# Altium PCB ESP32 with USBC PCB V1.PcbDoc (part 1 of 3)
Units mil, origin at the board's own origin, x right, y up, seen from the top; angles counter-clockwise.
Board outline 2800 x 1000 mil, 4 copper layers (L1, L2, L3, L4), stack 61.583 mil thick; 64 components, 73 nets, 299 pads, 158 vias.
Unrouted connection lines stored in the file: 2.
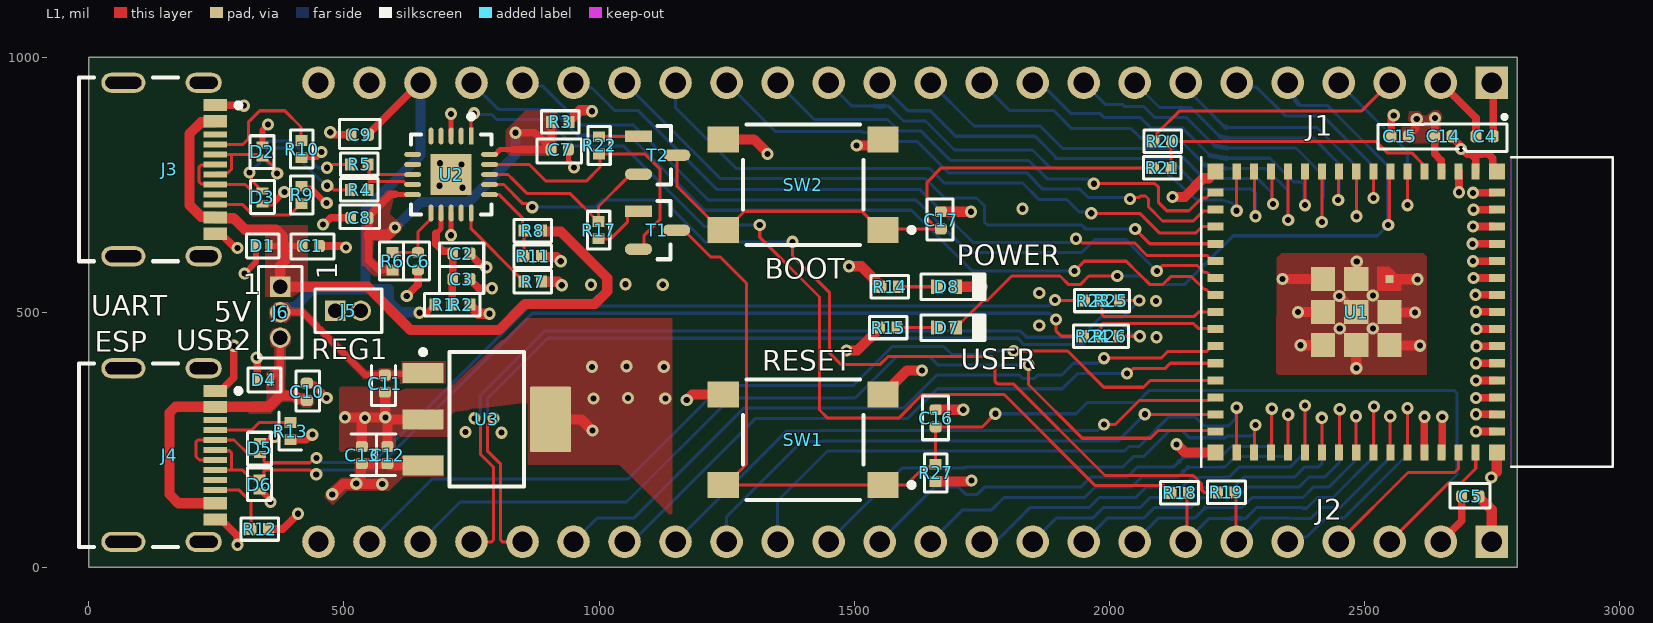
[diagram p0: L1 view]
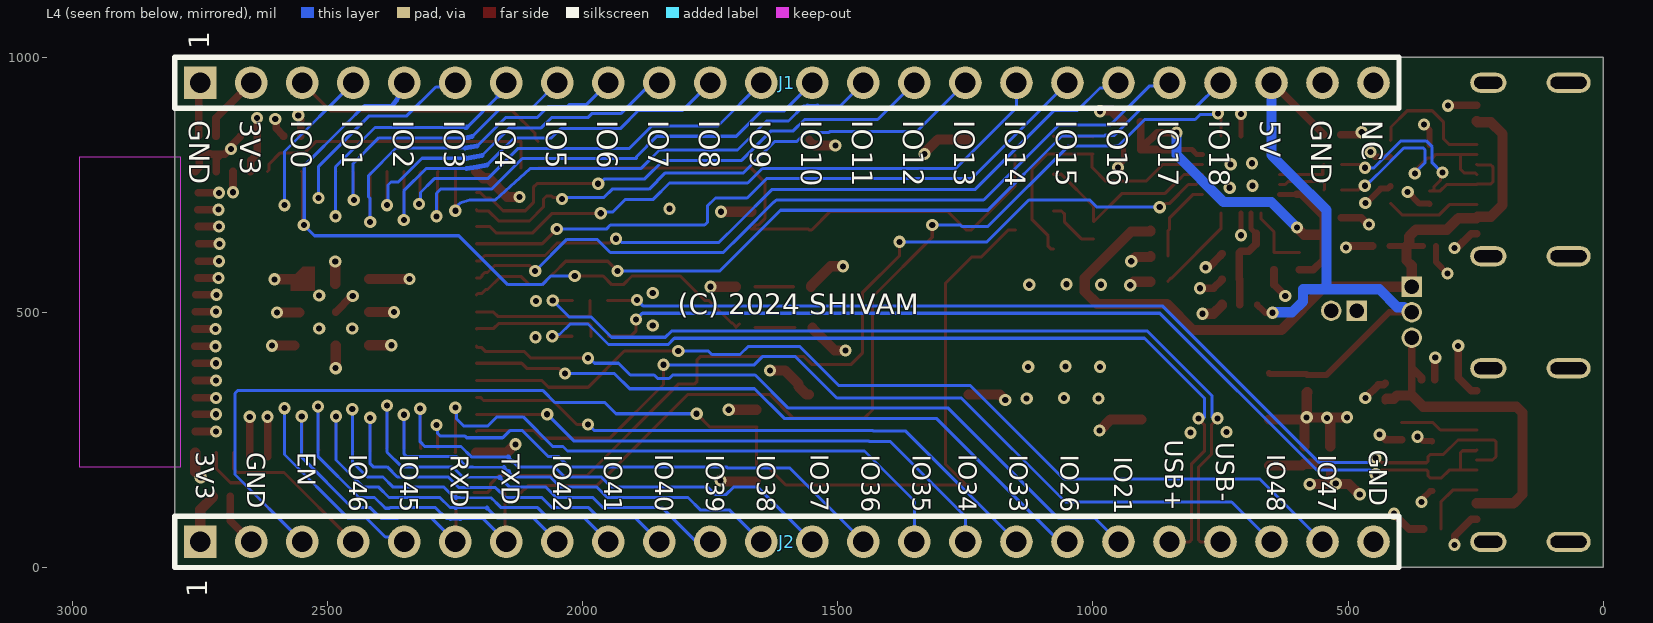
[diagram p1: L4 view, seen from below]
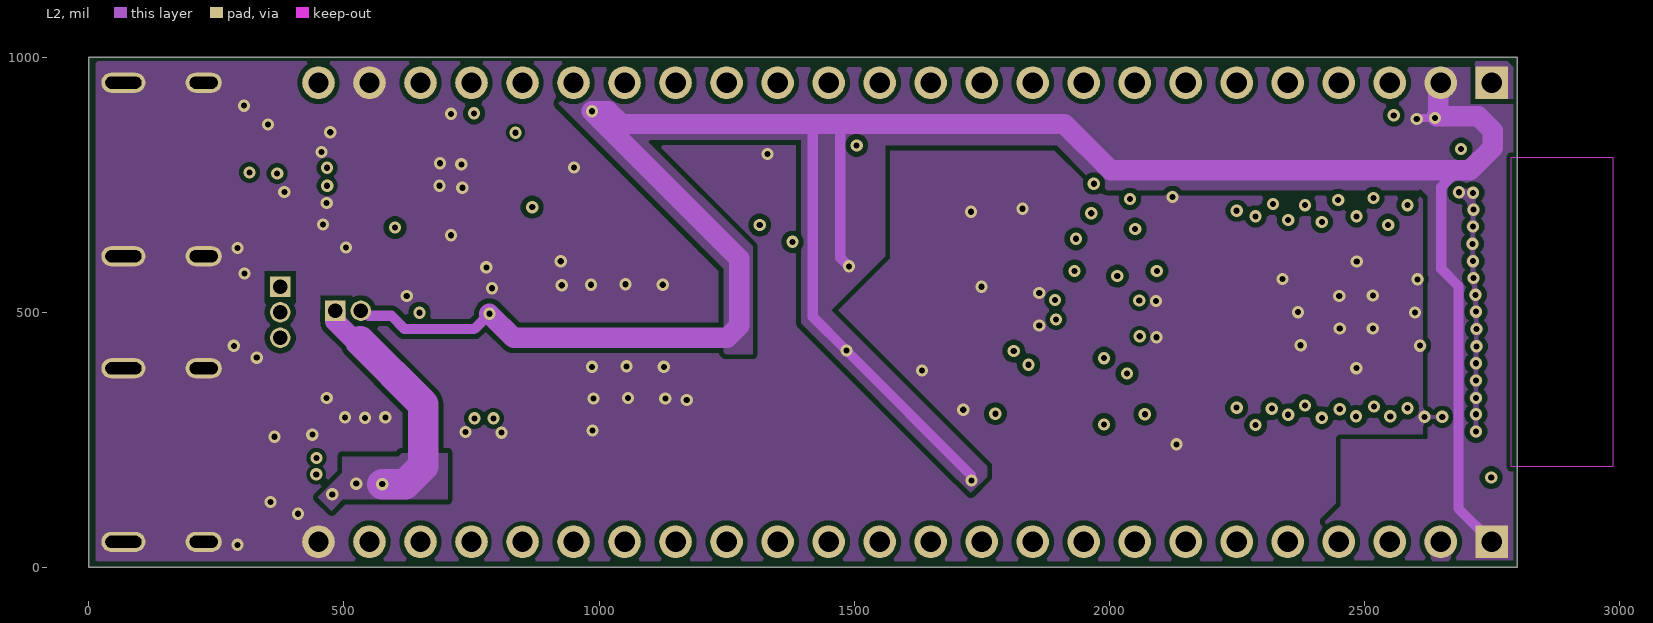
[diagram p2: L2]
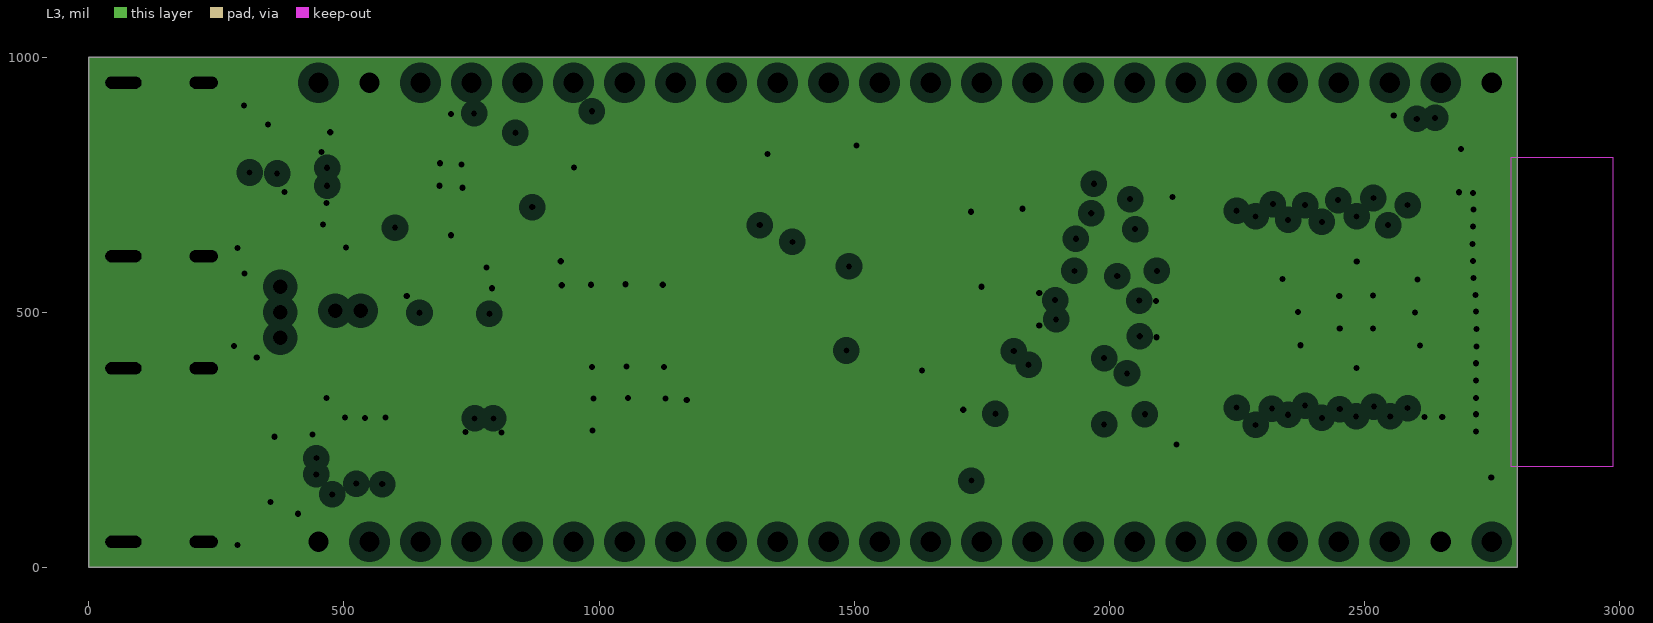
[diagram p3: L3, clearances drawn from the general rule]
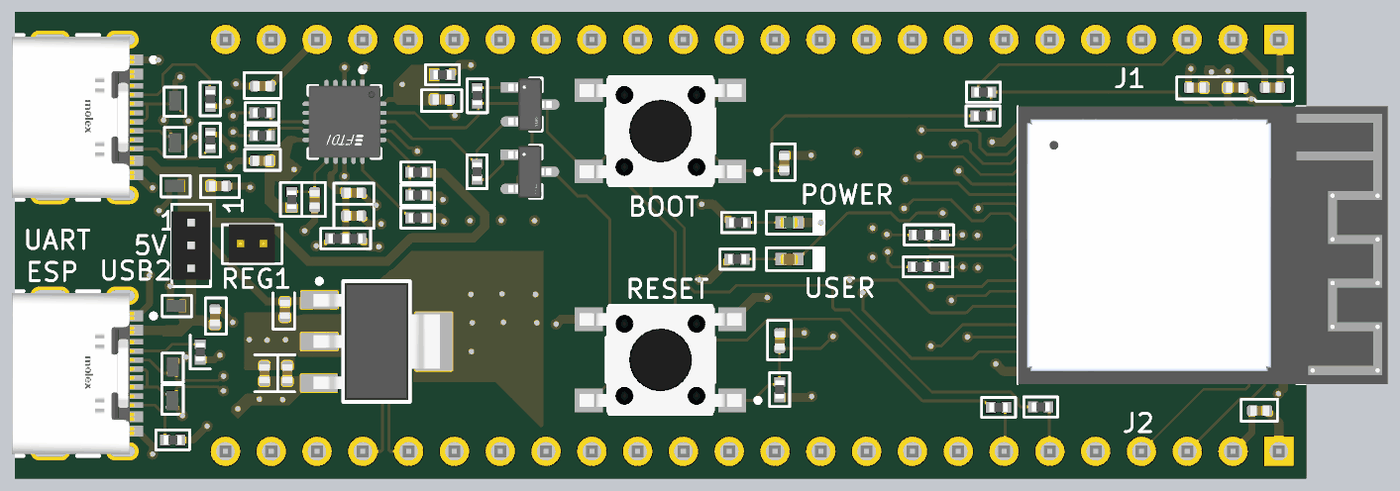
[diagram p5: 3D render of the assembled board from above, using the file's embedded part models]

## Layer stack, top to bottom
Top Solder: solder mask 0.4, Solder Resist, Dk 3.5
L1: signal copper 1.378
Dielectric 2: prepreg 3.9134, PP-006, Dk 4.1
L2: signal copper 0.5984
Dielectric 1: dielectric 49.8031, FR-4, Dk 4.8
L3: plane copper 0.5984, net GND
Dielectric 3: prepreg 3.9134, PP-006, Dk 4.1
L4: signal copper 1.378
Bottom Solder: solder mask 0.4, Solder Resist, Dk 3.5

## Board outline
0,0 2800,0 2800,1000 0,1000

## Design rules (kind name [scope] priority, off if disabled: settings)
Clearance SMALLER_1 [(WithinRoom('CONNECTOR_2')) And (Layer = 'L1')] p1: gap=6 ignorepadtopadclearanceinfootprint=FALSE
Clearance SMALLER_2 [WithinRoom('CONNECTOR_1')] p2: gap=6 ignorepadtopadclearanceinfootprint=FALSE
Clearance SMALLER [WithinRoom('FTDI')] p3: gap=6 ignorepadtopadclearanceinfootprint=FALSE
Clearance "DIFF90 CLEARANCE" [InDifferentialPairClass('DIFF90')] p4: gap=8 ignorepadtopadclearanceinfootprint=FALSE
Clearance [All] p5: gap=10 ignorepadtopadclearanceinfootprint=FALSE except(6: SMDPad-SMDPad)
ComponentClearance R24R26 [InComponent('R24') vs InComponent('R26')] p1: gap=0 collisioncheckmode=3 verticalgap=0 showdistances=FALSE
ComponentClearance R1R2 [InComponent('R1') vs InComponent('R2')] p2: gap=0 collisioncheckmode=3 verticalgap=0 showdistances=FALSE
ComponentClearance R23R25 [InComponent('R23') vs InComponent('R25')] p3: gap=0 collisioncheckmode=3 verticalgap=0 showdistances=FALSE
ComponentClearance [All] p4: gap=10 collisioncheckmode=3 verticalgap=10 showdistances=FALSE
DiffPairsRouting DIFF90 [InDifferentialPairClass('DIFF90')] p1: maxlimit=10 minlimit=8 mostfreqgap=8 toplayer_minwidth=6.03 toplayer_maxwidth=6.23 toplayer_prefwidth=6.03 midlayer1_maxgap=8.1 midlayer1_minwidth=5.1 midlayer1_maxwidth=5.2 midlayer1_prefwidth=5.1 bottomlayer_maxgap=8.1 bottomlayer_minwidth=6.03 bottomlayer_maxwidth=6.03 bottomlayer_prefwidth=6.03 maxuncoupledlength=500
MinimumSolderMaskSliver [All] p1: minsoldermaskwidth=3.15
PlaneClearance [All] p1: clearance=20
PlaneConnect [All] p1: pad.planeconnectstyle=Relief pad.reliefexpansion=15 pad.reliefentries=4 pad.reliefconductorwidth=20 pad.reliefairgap=10 via.planeconnectstyle=Direct via.reliefexpansion=20 via.reliefentries=4 via.reliefconductorwidth=10 via.reliefairgap=10
PolygonConnect [All] p1: connectstyle=Direct reliefconductorwidth=10 reliefentries=4 polygonreliefangle="90 Angle" airgapwidth=10
RoomDefinition FTDI [False vs False] p1: confinementstyle=ConfineIn formatcopy=TRUE lockcomponents=FALSE outline 610,888 837,888 837,637 610,637
RoomDefinition CONNECTOR_2 [False vs False] p2: confinementstyle=ConfineIn formatcopy=TRUE lockcomponents=FALSE outline 136,376 323,376 323,61 136,61
RoomDefinition CONNECTOR_1 [False vs False] p3: confinementstyle=ConfineIn formatcopy=TRUE lockcomponents=FALSE outline -17,1003 307,1003 307,543 -17,543
RoutingVias [All] p1: holewidth=12 width=24 viastyle="Through Hole" minholewidth=12 minwidth=24 maxholewidth=12 maxwidth=24
SilkToSilkClearance [All] p1: silktosilkclearance=6
SilkToSolderMaskClearance [IsPad] p1: minsilkscreentomaskgap=6 clearancetoexposedcopper=TRUE
SolderMaskExpansion [All] p1: expansion=2 istentingtop=FALSE
SupplyNets "Schematic Supply Nets_5" [InNet('+5V_VBUS2')] p1: voltage=0.000
SupplyNets "Schematic Supply Nets_4" [InNet('+5V')] p2: voltage=0.000
SupplyNets "Schematic Supply Nets_3" [InNet('GND')] p3: voltage=0.000
SupplyNets "Schematic Supply Nets_2" [InNet('+5V_VBUS1')] p4: voltage=0.000
SupplyNets "Schematic Supply Nets_1" [InNet('+3V3')] p5: voltage=0.000
SupplyNets "Schematic Supply Nets" [InNet('3.3V_REG')] p6: voltage=0.000
Width [All] p1: maxlimit=100 minlimit=6 preferedwidth=10 minimp=50.000000 maximp=50.000000 favimp=50.000000
23 further rules are at their usual default settings.

## Classes and differential pairs
differential pair class DIFF90: CON1_USB CON2_USB CON_ESP_USB ESP_USB FTDI_USB
differential pair FTDI_USB: +FTDI_USB_P -FTDI_USB_N
differential pair ESP_USB: +ESP_USB_P -ESP_USB_N
differential pair CON_ESP_USB: +CON_ESP_USB_P -CON_ESP_USB_N
differential pair CON2_USB: +CON2_USB_P -CON2_USB_N
differential pair CON1_USB: +CON1_USB_P -CON1_USB_N

## Components (designator, comment, footprint, x,y, rotation, side; value= is the part's Value field where it differs from the comment)
C1 "100nF, 50V" CAPC1005X55N 435,630 r180 top
C2 "4u7, 16V" CAPC1005X55N 730,615 r180 top value=4.7uF
C3 "100nF, 50V" CAPC1005X55N 730,565 r180 top
C4 "100nF, 50V" CAPC1005X55N 2736,845 r180 top
C5 "100nF, 50V" CAPC1005X55N 2708,139 r0 top
C6 "100nF, 50V" CAPC1005X55N 645,600 r90 top
C7 "100nF, 50V" CAPC1005X55N 923,819 r180 top
C8 "100nF, 50V" CAPC1005X55N 530,685 r0 top
C9 "100nF, 50V" CAPC1005X55N 531,848 r0 top
C10 "100nF, 50V" CAPC1005X55N 427,344.07 r270 top
C11 "4u7, 16V" CAPC1005X55N 580,360 r90 top value=4.7uF
C12 "10uF, 10V" CAPC1005X55N 585,220 r270 top value=10uF
C13 "10uF, 10V" CAPC1005X55N 535,220 r270 top value=10uF
C14 "10uF, 10V" CAPC1005X55N 2655,845 r180 top value=10uF
C15 "100nF, 50V" CAPC1005X55N 2570,845 r0 top
C16 "1uF, 35V" CAPC1005X55N 1660,292 r90 top value=1uF
C17 "100nF, 50V" CAPC1005X55N 1670,680 r270 top
D1 "AQ3045-01ETG" SOD882 340,630 r180 top
D2 "AQ3045-01ETG" SOD882 340,815 r90 top
D3 "AQ3045-01ETG" SOD882 340,725 r270 top
D4 "AQ3045-01ETG" SOD882 343,368 r180 top
D5 "AQ3045-01ETG" SOD882 335,233.8 r90 top
D6 "AQ3045-01ETG" SOD882 334,162.2 r270 top
D7 "RED LED" LED0402R 1681.3,470 r180 top
D8 "GREEN" LED0402G 1681.3,550 r180 top
J1 "0022284245" HDR_1X24_2.54MM 2750,950 r90 bottom locked
J2 "0022284245" HDR_1X24_2.54MM 2750,50 r90 bottom locked
J3 "217179-0001" FP-2171790001-MFG 112.8,779.92 r270 top locked
J4 "217179-0001" FP-2171790001-MFG 112.8,220.08 r270 top locked
J5 "FTS-102-01-F-S" HDR_1X2_1.27MM 483,503 r90 top
J6 "FTS-103-01-F-S" HDR_1X3_1.27MM 375,550 r0 top locked
R1 "0R" RESC1005X37N 695,515 r0 top
R2 "0R" RESC1005X37N 730,515 r180 top
R3 "0R" RESC1005X37N 924.01,873 r180 top
R4 "27R" RESC1005X37N 530,740 r0 top
R5 "27R" RESC1005X37N 530,790 r0 top
R6 "0R" RESC1005X37N 595,600 r90 top
R7 "10K" RESC1005X37N 870,560 r180 top value=10kR
R8 "4k7" RESC1005X37N 870,660 r0 top value=4.7kR
R9 "5K1" RESC1005X37N 417,730 r270 top value=5.1kR
R10 "5K1" RESC1005X37N 417,820.01 r90 top value=5.1kR
R11 "10K" RESC1005X37N 870,610 r180 top value=10kR
R12 "5K1" RESC1005X37N 335,75 r180 top value=5.1kR
R13 "5K1" RESC1005X37N 395,266.99 r90 top value=5.1kR
R14 "1K" RESC1005X37N 1570,550 r180 top value=1kR
R15 "1K" RESC1005X37N 1567.01,470 r180 top value=1kR
R17 "10K" RESC1005X37N 999,661.01 r90 top value=10kR
R18 "0R" RESC1005X37N 2138,146 r180 top
R19 "0R" RESC1005X37N 2230,147 r180 top
R20 "27R" RESC1005X37N 2105,835 r0 top
R21 "27R" RESC1005X37N 2104,783 r0 top
R22 "10K" RESC1005X37N 1000,827.01 r90 top value=10kR
R23 "0R" RESC1005X37N 1968.99,523 r0 top
R24 "0R" RESC1005X37N 1966.99,453 r0 top
R25 "0R" RESC1005X37N 2003.01,523 r180 top
R26 "0R" RESC1005X37N 2001.01,453 r180 top
R27 "10K" RESC1005X37N 1660,185 r270 top value=10kR
SW1 "PTS645SM43SMTR92LFS" FP-PTS645SM43SMTR92LFS-MFG 1400,250 r180 top locked
SW2 "PTS645SM43SMTR92LFS" FP-PTS645SM43SMTR92LFS-MFG 1400,750 r180 top locked
T1 "SS8050-G" FP-SS8050-G-IPC_B 1114.58,661 r0 top
T2 "SS8050-G" FP-SS8050-G-IPC_B 1115,808 r0 top
U1 "ESP32-S3-MINI-1-N8" XCVR_ESP32-S3-MINI-1-N8 2484.41,500.39 r270 top locked
U2 "FT231XQ-R" FP-QFN-20-IPC_B 710,770 r270 top locked
U3 "TL1963A-33DCYR" DCY0004A_M 780,290 r0 top locked

## Footprints (in the part's own frame and the unit in brackets; to place one, negate y for a bottom-side part, rotate by r counter-clockwise, add the part's x,y. Pads: shape width x height; smd on the part's side, far side on the other; paste and mask are expansions set on the pad)
CAPC1005X55N [mm]
  rrect53% 0.54x0.6 smd: 1(-0.43,0) 2(0.43,0)
  silkscreen extent -1.14,-0.58 0.99,0.66, body extent -0.52,-0.28 0.52,0.28, height 0.56
DCY0004A_M [mm] "SOT223, 4-Leads, Body 6.7x3.7mm, Pitch 2.3mm, IPC Low Density"
  rrect10% 2.05x1 smd: 1(-3.175,2.3) 2(-3.175,0) 3(-3.175,-2.3)
  rrect5% 2.05x3.25 smd: 4(3.175,0)
  silkscreen extent -3.3,-3.35 1.85,3.47, body extent -3.5,-3.25 3.5,3.25, height 1.62
FP-2171790001-MFG [mm]
  rect 0.6x1.15 smd paste+0 mask+0: A1B12(-3.2,3.425) A4B9(-2.4,3.425) B1A12(3.2,3.425) B4A9(2.4,3.425)
  rect 0.3x1.15 smd paste+0 mask+0: A5(-1.25,3.425) A6(-0.25,3.425) A7(0.25,3.425) A8(1.25,3.425) B5(1.75,3.425) B6(0.75,3.425) B7(-0.75,3.425) B8(-1.75,3.425)
  rrect100% 1x1.8 hole 1.4 slot 0.6 at 0 deg paste-2539.97 mask+0: S1(-4.32,2.85) S2(4.32,2.85)
  rrect100% 1x2.2 hole 1.8 slot 0.6 at 0 deg paste-2539.97 mask+0: S3(-4.32,-1.15) S4(4.32,-1.15)
  silkscreen extent -4.57,-3.35 4.57,4.7, body extent -4.92,-3.45 4.92,4.1, height 0.25
FP-PTS645SM43SMTR92LFS-MFG [mm]
  rect 1.55x1.3 smd paste+0 mask+0: 1(-3.975,2.25) 2(3.975,2.25) 3(-3.975,-2.25) 4(3.975,-2.25)
  silkscreen extent -5.53,-3 3,3, body extent -4.5,-3 4.5,3, height 4.3
FP-QFN-20-IPC_B [mm]
  rect 0.84x0.242 smd paste+0 mask+0: 1(-1.916,1)
  rrect100% 0.84x0.242 smd paste+0 mask+0: 2(-1.916,0.5) 3(-1.916,0) 4(-1.916,-0.5) 5(-1.916,-1) 11(1.916,-1) 12(1.916,-0.5) 13(1.916,0) 14(1.916,0.5) 15(1.916,1)
  rrect100% 0.242x0.84 smd paste+0 mask+0: 6(-1,-1.916) 7(-0.5,-1.916) 8(0,-1.916) 9(0.5,-1.916) 10(1,-1.916) 16(1,1.916) 17(0.5,1.916) 18(0,1.916) 19(-0.5,1.916) 20(-1,1.916)
  rect 2.05x2.05 smd paste-1000 mask+0: 21(0,0)
  silkscreen extent -3.01,-2 2,2, body extent -2.59,-2.59 2.59,2.59, height 0.25
FP-SS8050-G-IPC_B [mm]
  rect 1.357x0.572 smd paste+0 mask+0: 1(-0.951,0.95)
  rrect100% 1.357x0.572 smd paste+0 mask+0: 2(-0.951,-0.95) 3(0.951,0)
  silkscreen extent 0,-1.45 0.65,1.45, body extent -1.88,-1.7 1.88,1.7, height 0.25
HDR_1X2_1.27MM [mil]
  rect 40x40 hole 28: 1(0,0)
  round 40 hole 28: 2(0,-50)
  silkscreen extent -42,-91 43,40, body extent -42,-75 44,25, height 154
HDR_1X3_1.27MM [mil]
  rect 40x40 hole 28: 1(0,0)
  round 40 hole 28: 2(0,-50) 3(0,-100)
  silkscreen extent -42,-140 42,40, body extent -42,-125 42,25, height 124
HDR_1X24_2.54MM [mil]
  rect 64x64 hole 40: 1(0,0)
  round 64 hole 40: 2(0,-100) 3(0,-200) 4(0,-300) 5(0,-400) 6(0,-500) 7(0,-600) 8(0,-700) 9(0,-800) 10(0,-900) 11(0,-1000) 12(0,-1100) 13(0,-1200) 14(0,-1300) 15(0,-1400) 16(0,-1500) 17(0,-1600) 18(0,-1700) 19(0,-1800) 20(0,-1900) 21(0,-2000) 22(0,-2100) 23(0,-2200) 24(0,-2300)
  silkscreen extent -50,-2350 50,50, body extent -49,-2350 49,50, height 386
LED0402G [mm]
  rect 0.6x0.7 smd: 1(-0.475,0) 2(0.475,0)
  silkscreen extent -1.91,-0.64 1.27,0.64, body extent -0.48,-0.3 0.52,0.3, height 0.21
LED0402R [mm]
  rect 0.6x0.7 smd: 1(-0.475,0) 2(0.475,0)
  silkscreen extent -1.91,-0.64 1.27,0.64, body extent -0.5,-0.28 0.5,0.32, height 0.21
RESC1005X37N [mm]
  rect 0.54x0.6 smd: 1(-0.432,0) 2(0.432,0)
  silkscreen extent -0.94,-0.56 0.94,0.56, body extent -0.5,-0.25 0.5,0.25, height 0.37
SOD882 [mm]
  rect 0.35x0.6 smd: 1(-0.325,0) 2(0.325,0)
  silkscreen extent -0.84,-0.58 0.79,0.61, body extent -0.51,-0.34 0.56,0.33, height 0.42
XCVR_ESP32-S3-MINI-1-N8 [mm]
  rect 0.8x0.4 smd: 1(-7,5.95) 2(-7,5.1) 3(-7,4.25) 4(-7,3.4) 5(-7,2.55) 6(-7,1.7) 7(-7,0.85) 8(-7,0) 9(-7,-0.85) 10(-7,-1.7) 11(-7,-2.55) 12(-7,-3.4) 13(-7,-4.25) 14(-7,-5.1) 15(-7,-5.95) 31(7,-5.95) 32(7,-5.1) 33(7,-4.25) 34(7,-3.4) 35(7,-2.55) 36(7,-1.7) 37(7,-0.85) 38(7,0) 39(7,0.85) 40(7,1.7) 41(7,2.55) 42(7,3.4) 43(7,4.25) 44(7,5.1) 45(7,5.95)
  rect 0.4x0.8 smd: 16(-5.95,-7) 17(-5.1,-7) 18(-4.25,-7) 19(-3.4,-7) 20(-2.55,-7) 21(-1.7,-7) 22(-0.85,-7) 23(0,-7) 24(0.85,-7) 25(1.7,-7) 26(2.55,-7) 27(3.4,-7) 28(4.25,-7) 29(5.1,-7) 30(5.95,-7) 46(5.95,7) 47(5.1,7) 48(4.25,7) 49(3.4,7) 50(2.55,7) 51(1.7,7) 52(0.85,7) 53(0,7) 54(-0.85,7) 55(-1.7,7) 56(-2.55,7) 57(-3.4,7) 58(-4.25,7) 59(-5.1,7) 60(-5.95,7)
  rect 1.2x1.2 smd: 61(0,0) 67(0,1.65) 68(1.65,1.65) 69(-1.65,0) 70(1.65,0) 71(-1.65,-1.65) 72(0,-1.65) 73(1.65,-1.65)
  rect 0.8x0.8 smd: 62(-7,7) 63(-7,-7) 64(7,-7) 65(7,7)
  rect 0.4x0.4 smd paste-1 mask+0: 66(-1.65,1.65)
  L1 region: -1.05,1.05 -2.25,1.05 -2.25,1.65 -1.65,2.25 -1.05,2.25
  Keep-Out Layer region: 7.7,7.725 -7.7,7.725 -7.7,12.775 7.7,12.775
  Keep-Out Layer region: 7.7,7.725 -7.7,7.725 -7.7,12.775 7.7,12.775
  silkscreen extent -9.82,-7.73 7.7,12.78, body extent -7.7,-7.73 7.7,12.78, height 2.55

## Part data
C1 C3 C4 C5 C6 C7 C8 C9 C10 C15 C17: library part CL05B104KB54PNC, "CAP CER 0.1UF 50V X7R 0402", Capacitor Type=Ceramic, LCSC Part Number=C307331, Manufacturer=Samsung, Supplier Part Number=1276-CL05B104KB54PNCDKR-ND, Category="Ceramic Capacitors", ComponentLink1Description=https://datasheet.ciiva.com:443/pdfs/VipMasterIC/IC/SEMS/SEMS-S-A0006318249/SEMS-S-A0006320959-1.pdf?src-supplier=IHS+Markit, ComponentLink1URL=https://datasheet.ciiva.com:443/pdfs/VipMasterIC/IC/SEMS/SEMS-S-A0006318249/SEMS-S-A0006320959-1.pdf?src-supplier=IHS+Markit, ComponentLink2Description=https://datasheet.octopart.com/CL05B104KB54PNC-Samsung-datasheet-8326407.pdf?src-supplier=TME, ComponentLink2URL=https://datasheet.octopart.com/CL05B104KB54PNC-Samsung-datasheet-8326407.pdf?src-supplier=TME, Dielectric Material=Ceramic, Manufacturer Part Number=CL05B104KB54PNC, Pins=2, Pricing="1=0.1, 10=0.036, 50=0.0246, 100=0.0211, 500=0.01508, 1000=0.0132, 2500=0.01122, 5000=0.01002 (USD)", Reach SVHC Compliant=Yes, RoHS=Yes, RoHS Compliant=Yes, Stock=515143, Supplier=Digikey
C2 C11: library part CL05A475MO5NUNC, "CAP CER 4.7UF 16V X5R 0402", Capacitor Type=Ceramic, Case/Package=0402, LCSC Part Number=C318563, Manufacturer=Samsung, Max Operating Temperature=85°C, Min Operating Temperature=-55°C, Package Shape=Rectangular, Package Style=SMTMeter, Rated DC Voltage (URdc)=16V, Supplier Part Number=1276-6836-1-ND, Temperature Characteristics Code=X5R, Tolerance  (fill in as +-)=20%, Category="Ceramic Capacitors", ComponentLink1Description=https://datasheet.ciiva.com:443/pdfs/VipMasterIC/IC/SEMS/SEMS-S-A0008384515/SEMS-S-A0008898881-1.pdf?src-supplier=IHS+Markit, ComponentLink1URL=https://datasheet.ciiva.com:443/pdfs/VipMasterIC/IC/SEMS/SEMS-S-A0008384515/SEMS-S-A0008898881-1.pdf?src-supplier=IHS+Markit, ComponentLink2Description=http://www.farnell.com/datasheets/2710653.pdf?src-supplier=Farnell, ComponentLink2URL=http://www.farnell.com/datasheets/2710653.pdf?src-supplier=Farnell, ComponentLink3Description=http://www.samsungsem.com/kr/support/product-search/mlcc/CL05A475MO5NUNC.jsp?src-supplier=Digikey, ComponentLink3URL=http://www.samsungsem.com/kr/support/product-search/mlcc/CL05A475MO5NUNC.jsp?src-supplier=Digikey, ComponentLink4Description=http://www.farnell.com/datasheets/2710653.pdf?src-supplier=Newark, ComponentLink4URL=http://www.farnell.com/datasheets/2710653.pdf?src-supplier=Newark, ComponentLink5Description=http://www.farnell.com/datasheets/2710653.pdf?src-supplier=Element14, ComponentLink5URL=http://www.farnell.com/datasheets/2710653.pdf?src-supplier=Element14, ComponentLink6Description=https://datasheet.octopart.com/CL05A475MO5NUNC-Samsung-Electro-Mechanics-datasheet-123102911.pdf?src-supplier=Future+Electronics, ComponentLink6URL=https://datasheet.octopart.com/CL05A475MO5NUNC-Samsung-Electro-Mechanics-datasheet-123102911.pdf?src-supplier=Future+Electronics, Dielectric Material=Ceramic, Height=0.7mm, JESD-609 Code=e3, Length=1mm, Manufacturer Part Number=CL05A475MO5NUNC, Mounting Technology="Surface Mount", Multilayer=Yes, Packaging="Tape and Reel", Pins=2, Pricing="1=0.45, 10=0.268, 50=0.1948, 100=0.1721, 500=0.1333, 1000=0.12121, 2500=0.10837, 5000=0.10058 (USD)", Reach SVHC Compliant=Yes, RoHS=Yes, RoHS Compliant=Yes, Stock=234731, Supplier=Digikey, Terminal Finish=Nickel, Termination=Wraparound, Tolerance (fill in as +-)=20%, Width=0.5mm
C12 C13 C14: library part CL05A106MP8NUB8, "CAP CER 10UF 10V X5R 0402", Capacitor Type=Ceramic, Case/Package=0402, LCSC Part Number=C307415, Manufacturer=Samsung, Max Operating Temperature=85°C, Min Operating Temperature=-55°C, Package Shape=Rectangular, Rated DC Voltage (URdc)=10V, Supplier Part Number=1276-6830-1-ND, Temperature Characteristics Code=X5R, Tolerance  (fill in as +-)=20%, Category="Ceramic Capacitors", ComponentLink1Description=https://datasheet.ciiva.com:443/pdfs/VipMasterIC/IC/SEMS/SEMS-S-A0008521219/SEMS-S-A0008521325-1.pdf?src-supplier=IHS+Markit, ComponentLink1URL=https://datasheet.ciiva.com:443/pdfs/VipMasterIC/IC/SEMS/SEMS-S-A0008521219/SEMS-S-A0008521325-1.pdf?src-supplier=IHS+Markit, ComponentLink2Description=http://www.samsungsem.com/kr/support/product-search/mlcc/CL05A106MP8NUB8.jsp?src-supplier=Digikey, ComponentLink2URL=http://www.samsungsem.com/kr/support/product-search/mlcc/CL05A106MP8NUB8.jsp?src-supplier=Digikey, ComponentLink3Description=https://datasheet.octopart.com/CL05A106MP8NUB8-Samsung-Electro-Mechanics-datasheet-136460857.pdf?src-supplier=Future+Electronics, ComponentLink3URL=https://datasheet.octopart.com/CL05A106MP8NUB8-Samsung-Electro-Mechanics-datasheet-136460857.pdf?src-supplier=Future+Electronics, Dielectric Material=Ceramic, JESD-609 Code=e3, Manufacturer Part Number=CL05A106MP8NUB8, Mounting Technology="Surface Mount", Multilayer=Yes, Packaging="Tape and Reel", Pins=2, Pricing="1=0.33, 10=0.215, 50=0.1584, 100=0.129, 500=0.1018, 1000=0.08597, 2500=0.08145 (USD)", Reach SVHC Compliant=Yes, RoHS=Yes, RoHS Compliant=Yes, Stock=942955, Supplier=Digikey, Terminal Finish=Nickel, Termination=Wraparound, Tolerance (fill in as +-)=20%
C16: library part CL05A105KL5NRNC, "Cap Ceramic 1uF 35V X5R 0.25pF SMD 0402 85°C Cardboard T/R", Case Code (Imperial)=0402, Case Code (Metric)=1005, LCSC Part Number=C307413, Manufacturer=Samsung, Max Operating Temperature=85°C, Min Operating Temperature=-55°C, Supplier Part Number=1276-6796-1-ND, Tolerance=10%, Voltage Rating=35V, Case/Package=0402, Category="Ceramic Capacitors", ComponentLink1Description=http://www.samsungsem.com/kr/support/product-search/mlcc/CL05A105KL5NRNC.jsp?src-supplier=Digikey, ComponentLink1URL=http://www.samsungsem.com/kr/support/product-search/mlcc/CL05A105KL5NRNC.jsp?src-supplier=Digikey, Length=0.039inch, Manufacturer Part Number=CL05A105KL5NRNC, Mounting Technology="Surface Mount", Packaging="Cut Tape", Pricing="1=0.33, 10=0.212, 50=0.149, 100=0.1202, 500=0.08934, 1000=0.07818, 2500=0.07446, 5000=0.06887 (USD)", RoHS=Yes, RoHS Compliant=Yes, Series=CL, Stock=307033, Supplier=Digikey, Thickness=0.022inch, Width=0.02inch
D1 D2 D3 D4 D5 D6: "TVS DIODE 5.3VWM 12VC SOD882", LCSC Part Number=C3710326, Manufacturer=Littelfuse, Max Breakdown Voltage=9V, Max Operating Temperature=150°C, Min Breakdown Voltage=6.8V, Min Operating Temperature=-55°C, Non-rep Peak Rev Power Dis-Max=40W, Package Body Material=Plastic, Package Shape=Rectangular, Package Style="CHIP CARRIERMeter", Rep Pk Reverse Voltage-Max=5.3V, Supplier Part Number=F9321CT-ND, Category="TVS Diodes", ComponentLink1Description=https://datasheet.ciiva.com:443/pdfs/VipMasterIC/IC/LFSI/LFSI-S-A0007892042/LFSI-S-A0007892042-1.pdf?src-supplier=IHS+Markit, ComponentLink1URL=https://datasheet.ciiva.com:443/pdfs/VipMasterIC/IC/LFSI/LFSI-S-A0007892042/LFSI-S-A0007892042-1.pdf?src-supplier=IHS+Markit, ComponentLink2Description=https://www.littelfuse.com/~/media/electronics/datasheets/tvs_diode_arrays/littelfuse_tvs_diode_array_aq3045_datasheet.pdf.pdf?src-supplier=Digikey, ComponentLink2URL=https://www.littelfuse.com/~/media/electronics/datasheets/tvs_diode_arrays/littelfuse_tvs_diode_array_aq3045_datasheet.pdf.pdf?src-supplier=Digikey, ComponentLink3Description=http://www.littelfuse.com/~/media/electronics/datasheets/tvs_diode_arrays/littelfuse_tvs_diode_array_aq3045_datasheet.pdf.pdf?src-supplier=Digikey, ComponentLink3URL=http://www.littelfuse.com/~/media/electronics/datasheets/tvs_diode_arrays/littelfuse_tvs_diode_array_aq3045_datasheet.pdf.pdf?src-supplier=Digikey, Diode Element Material=SILICON, Diode Type="TRANS VOLTAGE SUPPRESSOR", Manufacturer Part Number=AQ3045-01ETG, Number of Elements=1, Pins=2, Polarity=Bidirectional, Pricing="1=0.5, 10=0.391, 100=0.2344, 500=0.217, 1000=0.14756, 2000=0.13585, 5000=0.1302 (USD)", Reach SVHC Compliant=Yes, Reference Standard=AEC-Q101, RoHS=Yes, RoHS Compliant=Yes, Stock=10972, Supplier=Digikey, Surface Mount=Yes, Technology=AVALANCHE, Terminal Form="No Lead", Terminal Position=BOTTOM
D7: library part VLMS1500-GS08, "LED RED 0402 SMD", Color=Red, Forward Current=30mA, Forward Voltage=2.4V, LCSC Part Number=C511370, Manufacturer=Vishay, Max Operating Temperature=85°C, Min Operating Temperature=-30°C, Reverse Voltage-Max=5V, Supplier Part Number=VLMS1500-GS08CT-ND, Category=LEDs, Channels=1, Color@wavelength=Red, ComponentLink1Description=https://datasheet.ciiva.com:443/pdfs/VipMasterIC/IC/VISH/VISH-S-A0003457490/VISH-S-A0003457490-1.pdf?src-supplier=IHS+Markit, ComponentLink1URL=https://datasheet.ciiva.com:443/pdfs/VipMasterIC/IC/VISH/VISH-S-A0003457490/VISH-S-A0003457490-1.pdf?src-supplier=IHS+Markit, ComponentLink2Description=http://www.farnell.com/datasheets/1809983.pdf?src-supplier=Farnell, ComponentLink2URL=http://www.farnell.com/datasheets/1809983.pdf?src-supplier=Farnell, ComponentLink3Description=http://www.mouser.com/ds/2/427/vlmo1500-244705.pdf?src-supplier=Mouser, ComponentLink3URL=http://www.mouser.com/ds/2/427/vlmo1500-244705.pdf?src-supplier=Mouser, ComponentLink4Description=http://www.alliedelec.com/m/d/cfc385e1097fc985ee9a50a3551ac188.pdf?src-supplier=Allied+Electronics, ComponentLink4URL=http://www.alliedelec.com/m/d/cfc385e1097fc985ee9a50a3551ac188.pdf?src-supplier=Allied+Electronics, ComponentLink5Description=https://datasheet.octopart.com/VLMS1500-GS08-Vishay-datasheet-62332426.pdf?src-supplier=Newark, ComponentLink5URL=https://datasheet.octopart.com/VLMS1500-GS08-Vishay-datasheet-62332426.pdf?src-supplier=Newark, ComponentLink6Description=https://datasheet.octopart.com/VLMS1500-GS08-Vishay-datasheet-33014519.pdf?src-supplier=Element14, ComponentLink6URL=https://datasheet.octopart.com/VLMS1500-GS08-Vishay-datasheet-33014519.pdf?src-supplier=Element14, ComponentLink7Description=http://datasheet.octopart.com/VLMS1500-GS08-Vishay-datasheet-21227148.pdf?src-supplier=Avnet, ComponentLink7URL=http://datasheet.octopart.com/VLMS1500-GS08-Vishay-datasheet-21227148.pdf?src-supplier=Avnet, ComponentLink8Description=http://www.farnell.com/datasheets/1809983.pdf?src-supplier=Newark, ComponentLink8URL=http://www.farnell.com/datasheets/1809983.pdf?src-supplier=Newark, ComponentLink9Description=http://www.farnell.com/datasheets/2050839.pdf?src-supplier=Newark, ComponentLink9URL=http://www.farnell.com/datasheets/2050839.pdf?src-supplier=Newark, ComponentLink10Description=https://datasheet.octopart.com/VLMS1500-GS08-Vishay-datasheet-21227148.pdf?src-supplier=Future+Electronics, ComponentLink10URL=https://datasheet.octopart.com/VLMS1500-GS08-Vishay-datasheet-21227148.pdf?src-supplier=Future+Electronics, ComponentLink11Description=http://datasheet.octopart.com/VLMS1500-GS08-Vishay-datasheet-21227148.pdf?src-supplier=Quest, ComponentLink11URL=http://datasheet.octopart.com/VLMS1500-GS08-Vishay-datasheet-21227148.pdf?src-supplier=Quest, ComponentLink12Description=http://datasheet.octopart.com/VLMS1500-GS08-Vishay-datasheet-21227148.pdf?src-supplier=NAC+Semi, ComponentLink12URL=http://datasheet.octopart.com/VLMS1500-GS08-Vishay-datasheet-21227148.pdf?src-supplier=NAC+Semi, ComponentLink13Description=http://datasheet.octopart.com/VLMS1500-GS08-Vishay-datasheet-21227148.pdf?src-supplier=LCSC, ComponentLink13URL=http://datasheet.octopart.com/VLMS1500-GS08-Vishay-datasheet-21227148.pdf?src-supplier=LCSC, Luminous Intensity-Nom=54mcd, Manufacturer Part Number=VLMS1500-GS08, Mounting Technology="Surface Mount", Optoelectronic Device Type="SINGLE COLOR LED", Overall Height=0.35mm, Packaging="Tape and Reel", Pins=2, Pricing="1=0.34, 10=0.265, 100=0.119, 500=0.10746, 1000=0.08827 (USD)", Reach SVHC Compliant=Yes, RoHS=Yes, RoHS Compliant=Yes, Shape=Rectangular, Size=0.5mm, Stock=51454, Supplier=Digikey, Terminal Pitch=0.95mm, Viewing Angle=130°
D8: library part VLMG1500-GS08, "LED YLW-GRN 0402 SMD", Color=Green,Yellow, Color@wavelength=Green, Forward Current=30mA, Forward Voltage=2.4V, LCSC Part Number=C511404, Manufacturer=Vishay, Max Operating Temperature=85°C, Min Operating Temperature=-30°C, Reverse Voltage-Max=5V, Supplier Part Number=VLMG1500-GS08CT-ND, Category=LEDs, Channels=1, ComponentLink1Description=https://datasheet.ciiva.com:443/pdfs/VipMasterIC/IC/VISH/VISH-S-A0003457490/VISH-S-A0003457490-1.pdf?src-supplier=IHS+Markit, ComponentLink1URL=https://datasheet.ciiva.com:443/pdfs/VipMasterIC/IC/VISH/VISH-S-A0003457490/VISH-S-A0003457490-1.pdf?src-supplier=IHS+Markit, ComponentLink2Description=https://datasheet.ciiva.com/12071/vlmo1500-244705-12071911.pdf?src-supplier=Mouser, ComponentLink2URL=https://datasheet.ciiva.com/12071/vlmo1500-244705-12071911.pdf?src-supplier=Mouser, ComponentLink3Description=https://datasheet.ciiva.com/30005/vlmo1500-30005134.pdf?src-supplier=Avnet, ComponentLink3URL=https://datasheet.ciiva.com/30005/vlmo1500-30005134.pdf?src-supplier=Avnet, Luminous Intensity-Nom=90mcd, Manufacturer Part Number=VLMG1500-GS08, Mounting Technology="Surface Mount", Optoelectronic Device Type="SINGLE COLOR LED", Overall Height=0.35mm, Packaging="Tape and Reel", Pins=2, Pricing="1=0.34, 10=0.265, 100=0.119, 500=0.10746, 1000=0.08827 (USD)", Reach SVHC Compliant=Yes, RoHS=Yes, RoHS Compliant=Yes, Shape=Rectangular, Size=0.5mm, Stock=106048, Supplier=Digikey, Terminal Pitch=0.95mm, Viewing Angle=130°
J1 J2: "CONN HEADER VERT 24POS 2.54MM", Flammability Rating="UL94 V-0", LCSC Part Number=C7145888, Manufacturer=Molex, Supplier Part Number=900-0022284245-ND, Category=Uncategorized, ComponentLink1Description=https://datasheet.ciiva.com:443/pdfs/VipMasterIC/IC/MOLE/MOLE-S-A0006764423/MOLE-S-A0006877704-1.pdf?src-supplier=IHS+Markit, ComponentLink1URL=https://datasheet.ciiva.com:443/pdfs/VipMasterIC/IC/MOLE/MOLE-S-A0006764423/MOLE-S-A0006877704-1.pdf?src-supplier=IHS+Markit, ComponentLink2Description=https://datasheet.ciiva.com/6814/022284363-sd-6814049.pdf?src-supplier=Digikey, ComponentLink2URL=https://datasheet.ciiva.com/6814/022284363-sd-6814049.pdf?src-supplier=Digikey, ComponentLink3Description=https://datasheet.ciiva.com/10075/0022284245-pcb-headers-10075617.pdf?src-supplier=Avnet, ComponentLink3URL=https://datasheet.ciiva.com/10075/0022284245-pcb-headers-10075617.pdf?src-supplier=Avnet, ComponentLink4Description=https://datasheet.ciiva.com/5153/0022284245-pcb-headers-228340-5153875.pdf?src-supplier=Mouser, ComponentLink4URL=https://datasheet.ciiva.com/5153/0022284245-pcb-headers-228340-5153875.pdf?src-supplier=Mouser, ComponentLink5Description=https://datasheet.ciiva.com/1433/1597854-1433759.pdf?src-supplier=Element14, ComponentLink5URL=https://datasheet.ciiva.com/1433/1597854-1433759.pdf?src-supplier=Element14, Connector Type="BOARD CONNECTOR", Contact Finish - Mating=GOLD, Contact Finish - Termination="Tin (Sn)", Contact Gender=Male, Contact Material=Brass, DIN Conformance=No, Filter Feature=No, IEC Conformance=No, JESD-609 Code=e3, Manufacturer Part Number=0022284245, Mating Information="MULTIPLE MATING PARTS AVAILABLE", MIL Conformance=No, Mixed Contacts=No, Mounting Style=STRAIGHT, Mounting Technology=Board, Number of Contacts=24, Number of Rows Loaded=1, Option="General Purpose", Pricing="1=0.95, 10=0.789, 100=0.6579, 1000=0.57911 (USD)", Reach SVHC Compliant=Yes, RoHS=Yes, RoHS Compliant=Yes, Stock=2984, Supplier=Digikey, Terminal Pitch=2.54mm, Termination=Solder
J3 J4: "CONN RCP USB2.0 TYP C 24P SMD RA", LCSC Part Number=C3197684, Manufacturer=Molex, Supplier Part Number=900-2171790001CT-ND, Category="USB Connectors", Manufacturer Part Number=217179-0001, Pricing="1=0.9, 10=0.745, 100=0.6212 (USD)", RoHS=No, Stock=14335, Supplier=Digikey
J5: "CONN HEADER VERT 2POS 1.27MM", Flammability Rating="UL94 V-0", LCSC Part Number=C6045317, Manufacturer=Samtec, Manufacturer Series=FTS, Supplier Part Number=SAM15176-ND, Additional Feature="Low Profile", Category=Connectors, ComponentLink1Description=https://datasheet.ciiva.com:443/pdfs/VipMasterIC/IC/SAMI/SAMI-S-A0001504673/SAMI-S-A0001504673-1.pdf?src-supplier=IHS+Markit, ComponentLink1URL=https://datasheet.ciiva.com:443/pdfs/VipMasterIC/IC/SAMI/SAMI-S-A0001504673/SAMI-S-A0001504673-1.pdf?src-supplier=IHS+Markit, ComponentLink2Description=http://www.samtec.com/documents/webfiles/pdf/FTS.pdf?src-supplier=Avnet, ComponentLink2URL=http://www.samtec.com/documents/webfiles/pdf/FTS.pdf?src-supplier=Avnet, Connector Type="BOARD CONNECTOR", Contact Finish - Mating="GOLD (3) OVER NICKEL (50)", Contact Finish - Termination="Matte Tin (Sn) - with Nickel (Ni) barrier", Contact Gender=Male, Contact Material=Bronze, DIN Conformance=No, Filter Feature=No, IEC Conformance=No, JESD-609 Code=e3, Manufacturer Part Number=FTS-102-01-F-S, MIL Conformance=No, Mixed Contacts=No, Mounting Style=STRAIGHT, Mounting Technology=Board, Number of Contacts=2, Number of Rows Loaded=1, Option="General Purpose", Pricing="1=0.49, 50=0.4252, 100=0.3608, 500=0.2994, 1000=0.2625 (USD)", Reach SVHC Compliant=Yes, RoHS=Yes, RoHS Compliant=Yes, Stock=848, Supplier=Digikey, Terminal Pitch=1.27mm, Termination=Solder
J6: "CONN HEADER VERT 3POS 1.27MM", Flammability Rating="UL94 V-0", Manufacturer=Samtec, Manufacturer Series=FTS, Supplier Part Number=612-FTS-103-01-F-S-ND, Additional Feature="Low Profile", Category=Connectors, ComponentLink1Description=https://datasheet.ciiva.com:443/pdfs/VipMasterIC/IC/SAMI/SAMI-S-A0001504673/SAMI-S-A0001504673-1.pdf?src-supplier=IHS+Markit, ComponentLink1URL=https://datasheet.ciiva.com:443/pdfs/VipMasterIC/IC/SAMI/SAMI-S-A0001504673/SAMI-S-A0001504673-1.pdf?src-supplier=IHS+Markit, ComponentLink2Description=http://suddendocs.samtec.com/prints/fts-1xx-xx-xx-xx-xx-mkt.pdf?src-supplier=Digikey, ComponentLink2URL=http://suddendocs.samtec.com/prints/fts-1xx-xx-xx-xx-xx-mkt.pdf?src-supplier=Digikey, ComponentLink3Description=http://www.samtec.com/documents/webfiles/pdf/FTS.pdf?src-supplier=Avnet, ComponentLink3URL=http://www.samtec.com/documents/webfiles/pdf/FTS.pdf?src-supplier=Avnet, ComponentLink4Description=https://datasheet.octopart.com/FTS-103-01-F-S-Samtec-datasheet-116535195.pdf?src-supplier=Toby+Electronics, ComponentLink4URL=https://datasheet.octopart.com/FTS-103-01-F-S-Samtec-datasheet-116535195.pdf?src-supplier=Toby+Electronics, ComponentLink5Description=https://datasheet.octopart.com/FTS-103-01-F-S-Samtec-datasheet-151470456.pdf?src-supplier=Sager+Electronics, ComponentLink5URL=https://datasheet.octopart.com/FTS-103-01-F-S-Samtec-datasheet-151470456.pdf?src-supplier=Sager+Electronics, Connector Type="BOARD CONNECTOR", Contact Finish - Mating="GOLD (3) OVER NICKEL (50)", Contact Finish - Termination="Matte Tin (Sn) - with Nickel (Ni) barrier", Contact Gender=Male, Contact Material=Bronze, DIN Conformance=No, Filter Feature=No, IEC Conformance=No, JESD-609 Code=e3, Manufacturer Part Number=FTS-103-01-F-S, MIL Conformance=No, Mixed Contacts=No, Mounting Style=STRAIGHT, Mounting Technology=Board, Number of Contacts=3, Number of Rows Loaded=1, Option="General Purpose", Pricing="1=0.73, 50=0.6378, 100=0.5407, 500=0.4491, 1000=0.4 (USD)", Reach SVHC Compliant=Yes, RoHS=Yes, RoHS Compliant=Yes, Stock=2960, Supplier=Digikey, Terminal Pitch=1.27mm, Termination=Solder
R1 R2 R3 R6 R18 R19 R23 R24 R25 R26: library part RC0402JR-070RL, "Metal Glaze/thick Film, 0.0625W, 0ohm, Surface Mount, 0402", Case/Package=0402, LCSC Part Number=C60485, Manufacturer=Yageo, Max Operating Temperature=155°C, Min Operating Temperature=-55°C, Package Height=0.35mm, Package Length=1mm, Package Shape=Rectangular, Package Style=SMTMeter, Package Width=0.5mm, Power=62.5mW, Rated Temperature=70°C, Resistor Type="FIXED RESISTOR", Supplier Part Number=311-0.0JRCT-ND, Category="Chip SMD Resistors", ComponentLink1Description=https://datasheet.ciiva.com:443/pdfs/VipMasterIC/IC/YAGO/YAGO-S-A0008145938/YAGO-S-A0008145938-1.pdf?src-supplier=IHS+Markit, ComponentLink1URL=https://datasheet.ciiva.com:443/pdfs/VipMasterIC/IC/YAGO/YAGO-S-A0008145938/YAGO-S-A0008145938-1.pdf?src-supplier=IHS+Markit, Construction=Chip, JESD-609 Code=e3, Manufacturer Part Number=RC0402JR-070RL, Mounting Technology="Surface Mount", Packaging="Tape and Reel", Pins=2, Pricing="1=0.1, 10=0.011, 25=0.0084, 50=0.0064, 100=0.0045, 250=0.00364, 500=0.0029, 1000=0.00214, 5000=0.00154, 10000=0.00133, 30000=0.00117, 50000=0.00107, 100000=0.00105 (USD)", Reach SVHC Compliant=Yes, RoHS=Yes, RoHS Compliant=Yes, Stock=14576446, Supplier=Digikey, Technology="METAL GLAZE/THICK FILM", Terminal Finish=Nickel, Termination=Wraparound
R4 R5 R20 R21: library part RT0402BRD0727RL, "RES SMD 27 OHM 0.1% 1/16W 0402", Case/Package=0402, LCSC Part Number=C852682, Manufacturer=Yageo, Max Operating Temperature=155°C, Min Operating Temperature=-55°C, Package Height=0.3mm, Package Length=1mm, Package Style=SMTMeter, Package Width=0.5mm, Power=62.5mW, Rated Temperature=70°C, Resistor Type="FIXED RESISTOR", Supplier Part Number=13-RT0402BRD0727RLCT-ND, Temperature Coefficient=25ppm/°C, Tolerance=0.1%, Working Voltage=50V, Additional Feature="HIGH PRECISION", Category="Chip SMD Resistors", ComponentLink1Description=https://datasheet.ciiva.com:443/pdfs/VipMasterIC/IC/YAGO/YAGO-S-A0008510989/YAGO-S-A0008510989-1.pdf?src-supplier=IHS+Markit, ComponentLink1URL=https://datasheet.ciiva.com:443/pdfs/VipMasterIC/IC/YAGO/YAGO-S-A0008510989/YAGO-S-A0008510989-1.pdf?src-supplier=IHS+Markit, ComponentLink2Description=https://datasheet.ciiva.com/2582/pyu-rt-1-to-0-05-rohs-l-5-2582270.pdf?src-supplier=Digikey, ComponentLink2URL=https://datasheet.ciiva.com/2582/pyu-rt-1-to-0-05-rohs-l-5-2582270.pdf?src-supplier=Digikey, Construction=Chip, Manufacturer Part Number=RT0402BRD0727RL, Mounting Technology="Surface Mount", Packaging="Tape and Reel", Pins=2, Pricing="1=0.16, 10=0.121, 50=0.0958, 100=0.0859, 500=0.0654, 1000=0.0578, 5000=0.04283 (USD)", Reach SVHC Compliant=Yes, RoHS=Yes, RoHS Compliant=Yes, Stock=19970, Supplier=Digikey, Technology="THIN FILM", Termination=Wraparound
R7 R11 R17 R22 R27: library part AC0402FR-0710KL, "RES SMD 10K OHM 1% 1/16W 0402", Case/Package=0402, LCSC Part Number=C144807, Manufacturer=Yageo, Max Operating Temperature=155°C, Min Operating Temperature=-55°C, Package Height=0.32mm, Package Length=1mm, Package Shape=Rectangular, Package Style=SMTMeter, Package Width=0.5mm, Power=62.5mW, Rated Temperature=70°C, Resistor Type="FIXED RESISTOR", Supplier Part Number=YAG3436CT-ND, Temperature Coefficient=100ppm/°C, Tolerance=1%, Working Voltage=50V, Additional Feature="LASER TRIMMABLE", Category="Chip SMD Resistors", ComponentLink1Description=https://datasheet.ciiva.com:443/pdfs/VipMasterIC/IC/YAGO/YAGO-S-A0003597364/YAGO-S-A0003597364-1.pdf?src-supplier=IHS+Markit, ComponentLink1URL=https://datasheet.ciiva.com:443/pdfs/VipMasterIC/IC/YAGO/YAGO-S-A0003597364/YAGO-S-A0003597364-1.pdf?src-supplier=IHS+Markit, ComponentLink2Description=https://datasheet.ciiva.com/12656/pyu-ac-51-rohs-l-2-12656634.pdf?src-supplier=Mouser, ComponentLink2URL=https://datasheet.ciiva.com/12656/pyu-ac-51-rohs-l-2-12656634.pdf?src-supplier=Mouser, Construction=Chip, JESD-609 Code=e3, Manufacturer Part Number=AC0402FR-0710KL, Mounting Technology="Surface Mount", Packaging="Tape and Reel", Pins=2, Pricing="1=0.1, 10=0.019, 50=0.0116, 100=0.0095, 500=0.00638, 1000=0.00544, 5000=0.00391 (USD)", Reach SVHC Compliant=Yes, Reference Standard=AEC-Q200, RoHS=Yes, RoHS Compliant=Yes, Stock=2309318, Supplier=Digikey, Technology="METAL GLAZE/THICK FILM", Terminal Finish=Nickel, Termination=Wraparound
R8: library part RC0402FR-074K7L, "RES 4.7K OHM 1% 1/16W 0402", Case Code (Imperial)=0402, Case Code (Metric)=1005, LCSC Part Number=C105871, Manufacturer=Yageo, Max Operating Temperature=155°C, Max Power Dissipation=63mW, Min Operating Temperature=-55°C, Power Rating=62.5mW, Resistance Tolerance=1%, Resistor Type="Thick Film", Supplier Part Number=311-4.7KLRCT-ND, Temperature Coefficient=100ppm/°C, Voltage Rating=50V, Case/Package=0402, Category="Chip SMD Resistors", ComponentLink1Description=https://datasheet.ciiva.com/22661/1686128-22661342.pdf?src-supplier=Element14, ComponentLink1URL=https://datasheet.ciiva.com/22661/1686128-22661342.pdf?src-supplier=Element14, ComponentLink2Description=https://datasheet.ciiva.com/7850/1018594-7850022.pdf?src-supplier=Element14, ComponentLink2URL=https://datasheet.ciiva.com/7850/1018594-7850022.pdf?src-supplier=Element14, ComponentLink3Description=https://datasheet.ciiva.com/7850/1018594-7850023.pdf?src-supplier=Element14, ComponentLink3URL=https://datasheet.ciiva.com/7850/1018594-7850023.pdf?src-supplier=Element14, ComponentLink4Description=https://datasheet.ciiva.com/15215/getdatasheetpartid-328119-15215035.pdf?src-supplier=Verical, ComponentLink4URL=https://datasheet.ciiva.com/15215/getdatasheetpartid-328119-15215035.pdf?src-supplier=Verical, Construction=Rectangular, Depth=0.5mm, Features="Moisture Resistant", Lead Free="Lead Free", Length=1mm, Manufacturer Part Number=RC0402FR-074K7L, Military Standard=Not, Number of Terminations=2, Packaging="Tape and Reel", Pins=2, Pricing="1=0.1, 10=0.015, 50=0.0088, 100=0.0073, 500=0.00488, 1000=0.00417, 5000=0.00297, 10000=0.00261, 20000=0.00231, 30000=0.00216, 50000=0.00199, 100000=0.00179 (USD)", Reach SVHC Compliant=No, RoHS=Yes, RoHS Compliant=Yes, Series=RC, Stock=4735118, Supplier=Digikey, Termination=SMD/SMT, Tolerance=1%, Voltage Rating (AC)=50V, Voltage Rating (DC)=50V, Width=0.5mm
R9 R10 R12 R13: library part AC0402FR-075K1L, "RES SMD 5.1K OHM 1% 1/16W 0402", Case/Package=0402, LCSC Part Number=C144745, Manufacturer=Yageo, Max Operating Temperature=155°C, Min Operating Temperature=-55°C, Package Height=0.32mm, Package Length=1mm, Package Shape=Rectangular, Package Style=SMTMeter, Package Width=0.5mm, Power=62.5mW, Rated Temperature=70°C, Resistor Type="FIXED RESISTOR", Supplier Part Number=YAG3503CT-ND, Temperature Coefficient=100ppm/°C, Tolerance=1%, Working Voltage=50V, Additional Feature="LASER TRIMMABLE", Category="Chip SMD Resistors", ComponentLink1Description=https://datasheet.ciiva.com:443/pdfs/VipMasterIC/IC/YAGO/YAGO-S-A0003597364/YAGO-S-A0003597364-1.pdf?src-supplier=IHS+Markit, ComponentLink1URL=https://datasheet.ciiva.com:443/pdfs/VipMasterIC/IC/YAGO/YAGO-S-A0003597364/YAGO-S-A0003597364-1.pdf?src-supplier=IHS+Markit, ComponentLink2Description=https://datasheet.octopart.com/AC0402FR-075K1L-Yageo-datasheet-166720450.pdf?src-supplier=Future+Electronics, ComponentLink2URL=https://datasheet.octopart.com/AC0402FR-075K1L-Yageo-datasheet-166720450.pdf?src-supplier=Future+Electronics, ComponentLink3Description=http://www.yageo.com/documents/recent/PYu-AC_51_RoHS_L_2_revised.pdf?src-supplier=Future+Electronics, ComponentLink3URL=http://www.yageo.com/documents/recent/PYu-AC_51_RoHS_L_2_revised.pdf?src-supplier=Future+Electronics, Construction=Chip, JESD-609 Code=e3, Manufacturer Part Number=AC0402FR-075K1L, Mounting Technology="Surface Mount", Packaging="Tape and Reel", Pins=2, Pricing="1=0.1, 10=0.019, 50=0.0116, 100=0.0095, 500=0.00638, 1000=0.00544, 5000=0.00391 (USD)", Reach SVHC Compliant=Yes, Reference Standard=AEC-Q200, RoHS=Yes, RoHS Compliant=Yes, Stock=82772, Supplier=Digikey, Technology="METAL GLAZE/THICK FILM", Terminal Finish=Nickel, Termination=Wraparound
R14 R15: library part RC0402FR-071KL, "RES 1K OHM 1% 1/16W 0402", Case/Package=0402, LCSC Part Number=C106235, Manufacturer=Yageo, Max Operating Temperature=155°C, Min Operating Temperature=-55°C, Package Height=0.35mm, Package Length=1mm, Package Shape=Rectangular, Package Style=SMTMeter, Package Width=0.5mm, Power=62.5mW, Rated Temperature=70°C, Resistor Type="FIXED RESISTOR", Supplier Part Number=311-1.00KLRCT-ND, Temperature Coefficient=100ppm/°C, Tolerance=1%, Working Voltage=50V, Additional Feature="LASER TRIMMABLE", Category="Chip SMD Resistors", ComponentLink1Description=https://datasheet.ciiva.com:443/pdfs/VipMasterIC/IC/YAGO/YAGO-S-A0008145938/YAGO-S-A0008145938-1.pdf?src-supplier=IHS+Markit, ComponentLink1URL=https://datasheet.ciiva.com:443/pdfs/VipMasterIC/IC/YAGO/YAGO-S-A0008145938/YAGO-S-A0008145938-1.pdf?src-supplier=IHS+Markit, ComponentLink2Description=https://datasheet.ciiva.com/11819/0900766b80c66297-11819477.pdf?src-supplier=Rs, ComponentLink2URL=https://datasheet.ciiva.com/11819/0900766b80c66297-11819477.pdf?src-supplier=Rs, ComponentLink3Description=https://datasheet.ciiva.com/22747/1018594-22747513.pdf?src-supplier=Element14, ComponentLink3URL=https://datasheet.ciiva.com/22747/1018594-22747513.pdf?src-supplier=Element14, ComponentLink4Description=https://datasheet.ciiva.com/12666/pyu-rc0402-51-rohs-l-6-r-12666741.pdf?src-supplier=Mouser, ComponentLink4URL=https://datasheet.ciiva.com/12666/pyu-rc0402-51-rohs-l-6-r-12666741.pdf?src-supplier=Mouser, ComponentLink5Description=https://datasheet.ciiva.com/17063/pyu-rc0402-51-rohs-l-6-r-17063193.pdf?src-supplier=Future+Electronics, ComponentLink5URL=https://datasheet.ciiva.com/17063/pyu-rc0402-51-rohs-l-6-r-17063193.pdf?src-supplier=Future+Electronics, ComponentLink6Description=https://datasheet.ciiva.com/7983/1018594-7983502.pdf?src-supplier=Element14, ComponentLink6URL=https://datasheet.ciiva.com/7983/1018594-7983502.pdf?src-supplier=Element14, ComponentLink7Description=https://datasheet.ciiva.com/7849/1018594-7849869.pdf?src-supplier=Element14, ComponentLink7URL=https://datasheet.ciiva.com/7849/1018594-7849869.pdf?src-supplier=Element14, ComponentLink8Description=https://datasheet.ciiva.com/7849/1018594-7849871.pdf?src-supplier=Element14, ComponentLink8URL=https://datasheet.ciiva.com/7849/1018594-7849871.pdf?src-supplier=Element14, Construction=Chip, JESD-609 Code=e3, Manufacturer Part Number=RC0402FR-071KL, Mounting Technology="Surface Mount", Packaging="Tape and Reel", Pins=2, Pricing="1=0.1, 10=0.015, 50=0.0088, 100=0.0073, 500=0.00488, 1000=0.00417, 5000=0.00297, 10000=0.00261, 20000=0.00231, 30000=0.00216, 50000=0.00199, 100000=0.00179 (USD)", Reach SVHC Compliant=Yes, RoHS=Yes, RoHS Compliant=Yes, Stock=8002044, Supplier=Digikey, Technology="METAL GLAZE/THICK FILM", Terminal Finish=Nickel, Termination=Wraparound
SW1 SW2: "SWITCH TACTILE SPST-NO 0.05A 12V", Contact Current(DC)-Max=50mA, Contact DC Max Rating R Load=0.05A@12VDC, Contact Resistance=0.1mR, Contact Voltage(DC)-Max=12V, Dielectric Withstand Volts=250VACV, Insulation Resistance=100GR, LCSC Part Number=C221880, Manufacturer="ITT C&K", Max Operating Temperature=60°C, Min Operating Temperature=-20°C, Supplier Part Number=CKN9112CT-ND, Actuator Type=Pushbutton, Body Breadth=5.9944inch, Body Height=3.4544mm, Body Length or Diameter=5.9944mm, Category="Tactile Switches", ComponentLink1Description=https://datasheet.ciiva.com:443/pdfs/VipMasterIC/IC/CKCI/CKCI-S-A0001796527/CKCI-S-A0001796842-1.pdf?src-supplier=IHS+Markit, ComponentLink1URL=https://datasheet.ciiva.com:443/pdfs/VipMasterIC/IC/CKCI/CKCI-S-A0001796527/CKCI-S-A0001796842-1.pdf?src-supplier=IHS+Markit, ComponentLink2Description=https://datasheet.ciiva.com/29903/getdatasheetpartid-786341-29903846.pdf?src-supplier=Verical, ComponentLink2URL=https://datasheet.ciiva.com/29903/getdatasheetpartid-786341-29903846.pdf?src-supplier=Verical, ComponentLink3Description=https://datasheet.ciiva.com/14920/pts645-14920735.pdf?src-supplier=Digikey, ComponentLink3URL=https://datasheet.ciiva.com/14920/pts645-14920735.pdf?src-supplier=Digikey, ComponentLink4Description=https://datasheet.ciiva.com/14920/pts645-14920734.pdf?src-supplier=Digikey, ComponentLink4URL=https://datasheet.ciiva.com/14920/pts645-14920734.pdf?src-supplier=Digikey, Electrical Life=100000Cycles, JESD-609 Code=e4, Manufacturer Part Number=PTS645SM43SMTR92LFS, Mounting Technology="Surface Mount", PCB Hole Count=4, Pricing="1=0.32, 10=0.308, 25=0.2916, 100=0.2641, 250=0.24072, 500=0.22376 (USD)", Reach SVHC Compliant=Yes, RoHS=Yes, RoHS Compliant=Yes, Stock=304641, Supplier=Digikey, Switch Action=MOMENTARY, Switch Function=SPST, Switch Type=Keypad, Terminal Finish=Silver, Terminal Length=0.138inch, Termination=Solder
T1 T2: "TRANS NPN 25V 1.5A SOT23-3", LCSC Part Number=C164886, Manufacturer=Comchip, Supplier Part Number=641-1790-1-ND, Category=Transistors, ComponentLink1Description=https://datasheet.ciiva.com:443/pdfs/VipMasterIC/IC/COMC/COMC-S-A0004994192/COMC-S-A0004994192-1.pdf?src-supplier=IHS+Markit, ComponentLink1URL=https://datasheet.ciiva.com:443/pdfs/VipMasterIC/IC/COMC/COMC-S-A0004994192/COMC-S-A0004994192-1.pdf?src-supplier=IHS+Markit, ComponentLink2Description="http://www.comchiptech.com/admin/files/product/SS8050-G RevA181526.pdf?src-supplier=Digikey", ComponentLink2URL="http://www.comchiptech.com/admin/files/product/SS8050-G RevA181526.pdf?src-supplier=Digikey", Manufacturer Part Number=SS8050-G, Pricing="1=0.29, 10=0.2, 100=0.0978, 500=0.08154, 1000=0.05666 (USD)", Reach SVHC Compliant=Yes, RoHS=Yes, RoHS Compliant=Yes, Stock=83008, Supplier=Digikey
U1: "SMD module, ESP32-S3FN8, 8 MB SPI flash, PCB antenna", LCSC Part Number=C2913206, Manufacturer="Espressif Systems", Supplier Part Number=1965-ESP32-S3-MINI-1-N8CT-ND, Category=LDO, ComponentLink1Description=https://datasheet.octopart.com/ESP32-S3-MINI-1-N8-Espressif-Systems-datasheet-165560562.pdf?src-supplier=TME, ComponentLink1URL=https://datasheet.octopart.com/ESP32-S3-MINI-1-N8-Espressif-Systems-datasheet-165560562.pdf?src-supplier=TME, Manufacturer Part Number=ESP32-S3-MINI-1-N8, Pricing="1=3.1 (USD)", RoHS=No, Stock=18272, Supplier=Digikey
U2: "IC USB SERIAL FULL UART 20QFN", Case/Package=HVQCCN, LCSC Part Number=C132159, Manufacturer=FTDI, Max Operating Temperature=85°C, Max Supply Current=8.4mA, Max Supply Voltage=5.5V, Min Operating Temperature=-40°C, Min Supply Voltage=2.97V, Nominal Supply Voltage=5V, Package Shape=Square, Package Style="CHIP CARRIER, HEAT SINK/SLUG, VERY THIN PROFILEMeter", Power Supplies=3.3/5V, Supplier Part Number=768-1128-1-ND, Temperature Grade=INDUSTRIAL, Category="Interface ICs", ComponentLink1Description=https://datasheet.ciiva.com:443/pdfs/VipMasterIC/IC/FTDI/FTDIS00099/FTDIS00099-1.pdf?src-supplier=IHS+Markit, ComponentLink1URL=https://datasheet.ciiva.com:443/pdfs/VipMasterIC/IC/FTDI/FTDIS00099/FTDIS00099-1.pdf?src-supplier=IHS+Markit, ComponentLink2Description=https://datasheet.ciiva.com/1787/ds-ft231x-1787312.pdf?src-supplier=Digikey, ComponentLink2URL=https://datasheet.ciiva.com/1787/ds-ft231x-1787312.pdf?src-supplier=Digikey, ComponentLink3Description=https://datasheet.ciiva.com/4787/ds-ft231x-13571-4787570.pdf?src-supplier=Mouser, ComponentLink3URL=https://datasheet.ciiva.com/4787/ds-ft231x-13571-4787570.pdf?src-supplier=Mouser, ComponentLink4Description=https://datasheet.ciiva.com/30475/0900766b811020d3-30475405.pdf?src-supplier=Rs, ComponentLink4URL=https://datasheet.ciiva.com/30475/0900766b811020d3-30475405.pdf?src-supplier=Rs, ComponentLink5Description=https://datasheet.ciiva.com/1787/ft-x-series-1787313.pdf?src-supplier=Digikey, ComponentLink5URL=https://datasheet.ciiva.com/1787/ft-x-series-1787313.pdf?src-supplier=Digikey, ComponentLink6Description=https://datasheet.ciiva.com/1787/ft-x-series-1787314.pdf?src-supplier=Digikey, ComponentLink6URL=https://datasheet.ciiva.com/1787/ft-x-series-1787314.pdf?src-supplier=Digikey, Height - Seated (Max)=0.8mm, JESD-30 Code=S-XQCC-N20, Length=4mm, Manufacturer Part Number=FT231XQ-R, Pins=20, Pricing="1=2.34, 25=2.27, 100=2.2, 250=2, 500=1.82002, 1000=1.7625 (USD)", Qualification Status="Not Qualified", Reach SVHC Compliant=Yes, RoHS=Yes, RoHS Compliant=Yes, Stock=67530, Supplier=Digikey, Surface Mount=Yes, Technology=CMOS, Terminal Form="No Lead", Terminal Pitch=0.5mm, Terminal Position=QUAD, Width=4mm